# Altium PCB sensor_boom.PcbDoc
Units mil, origin at the board's own origin, x right, y up, seen from the top; angles counter-clockwise.
Board outline 2500 x 2500 mil, 2 copper layers (Top Layer, Bottom Layer); 22 components, 29 nets, 177 pads, 69 vias.
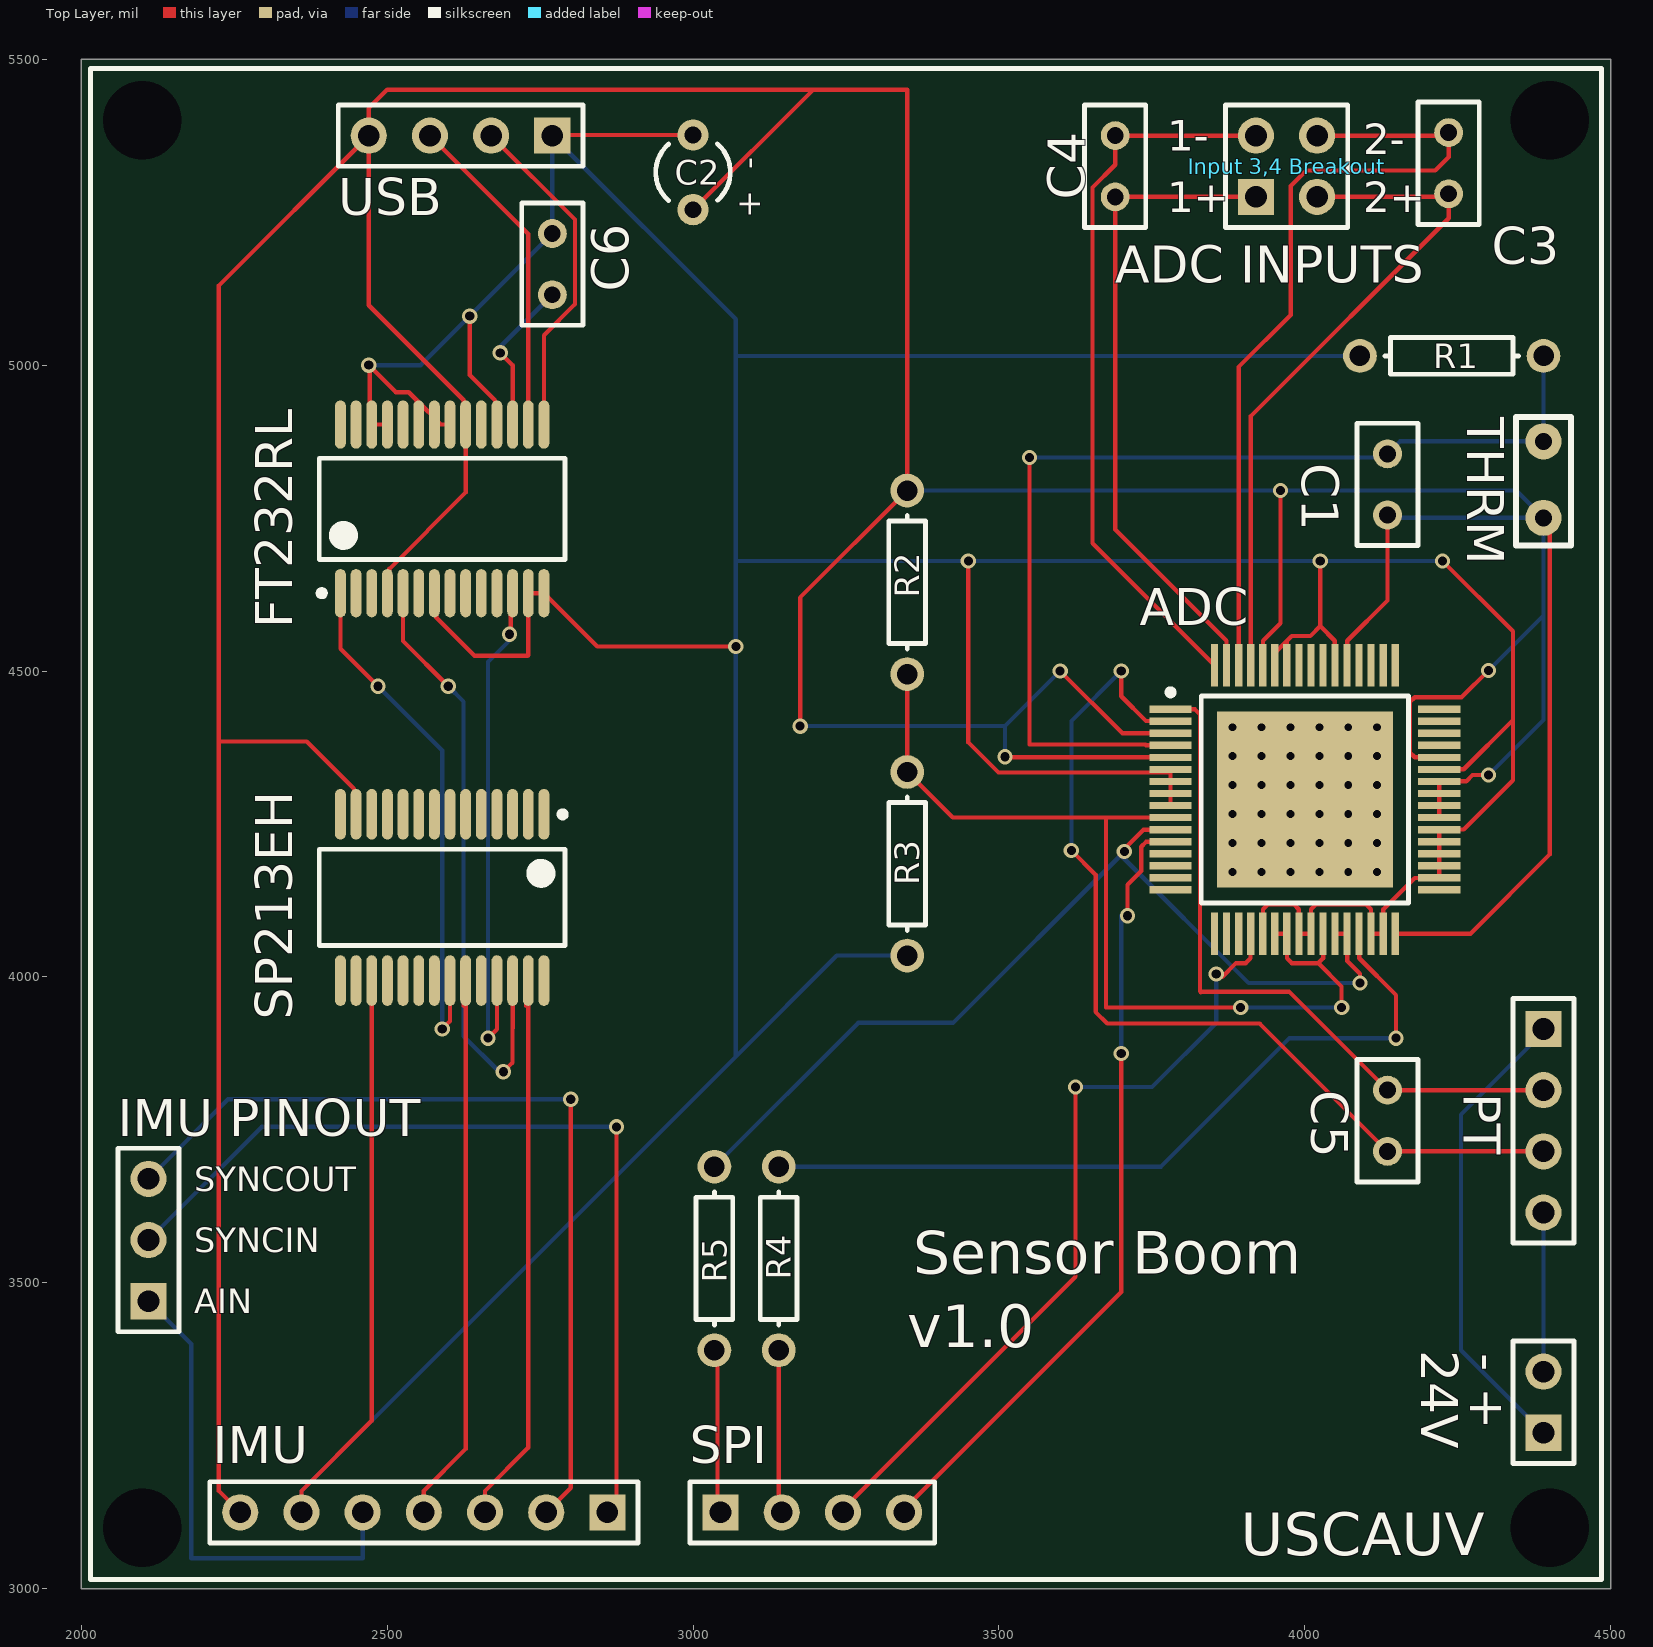
[diagram p0: Top Layer view]
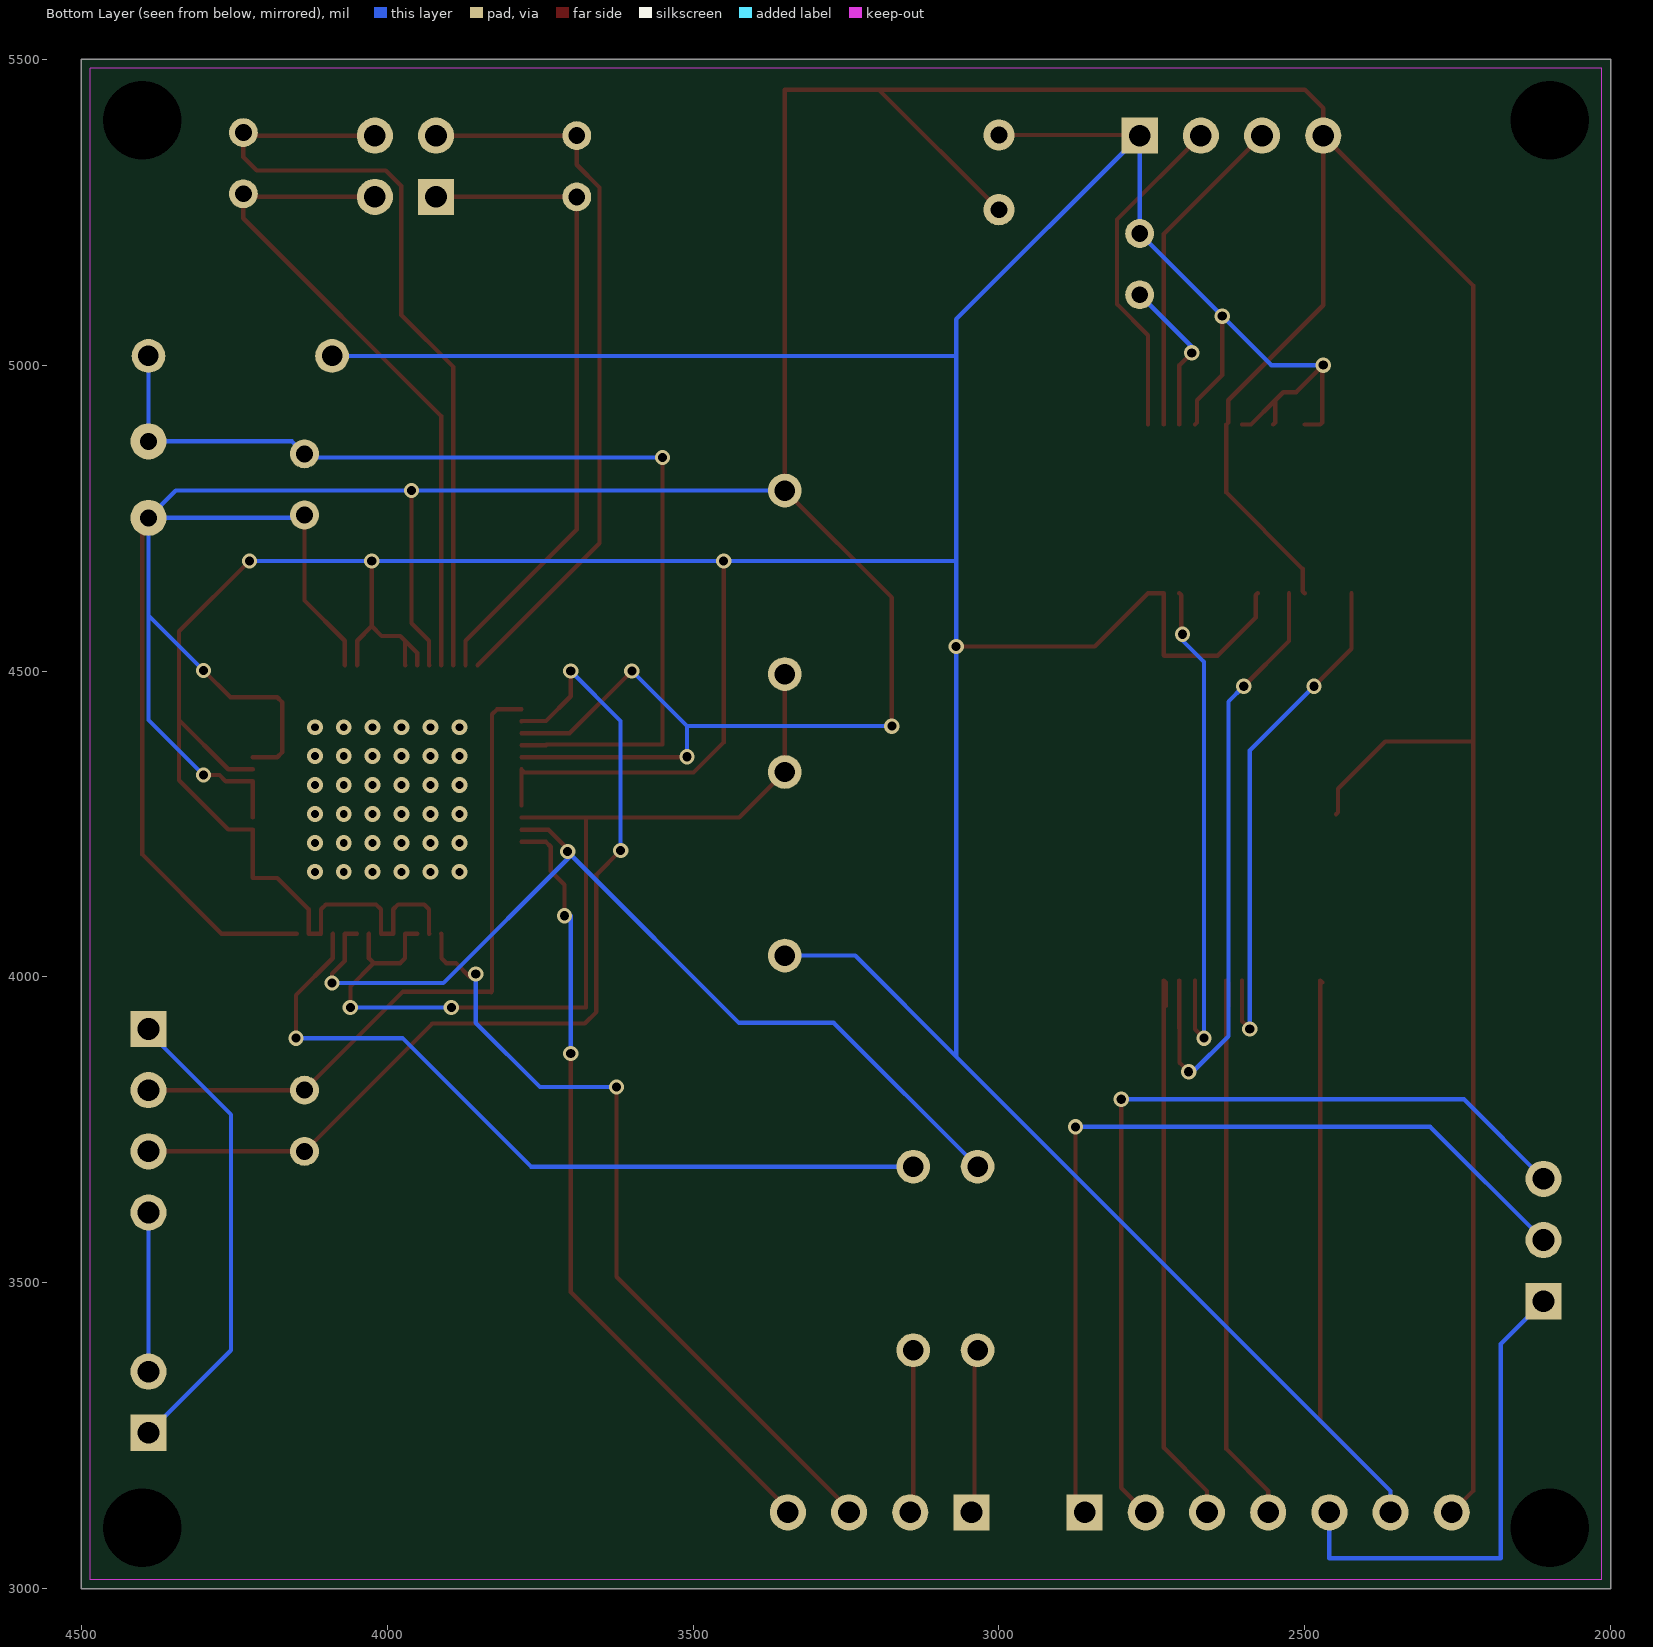
[diagram p1: Bottom Layer view, seen from below]

## Layer stack, top to bottom
Top Layer: signal copper 1.4
Dielectric: dielectric 12.6, FR-4, Dk 4.8
Bottom Layer: signal copper 1.4

## Board outline
2000,3000 4500,3000 4500,5500 2000,5500

## Design rules (kind name [scope] priority, off if disabled: settings)
Clearance [All] p1: gap=10
PolygonConnect [All] p1: connectstyle=Relief reliefconductorwidth=10 reliefentries=4 polygonreliefangle="90 Angle"
RoomDefinition sensor_boom [InComponentClass('sensor_boom')] p1: confinementstyle=ConfineIn formatcopy=TRUE lockcomponents=FALSE outline 4715,3000 13960,3000 13960,3840 4715,3840
RoutingVias [All] p1: holewidth=20 width=15 viastyle="Through Hole" minholewidth=28 minwidth=50 maxholewidth=28 maxwidth=50
SilkscreenOverComponentPads [All] p1: minsilkscreentomaskgap=10
SolderMaskExpansion [All] p1: expansion=4
Width [All] p1: maxlimit=7 minlimit=7 preferedwidth=7
27 further rules are at their usual default settings.

## Classes and differential pairs
component class sensor_boom: ADC C1 C2 C3 C4 C5 C6 IMU232Input IMU_BREAKOUT "Input 3,4 Breakout" R1 R2 R3 R4 R5 SPI_OUT

## Components (designator, comment, footprint, x,y, rotation, side; value= is the part's Value field where it differs from the comment)
"- +" "Header 2" HDR1X2 4390,3255 r90 top (schematic designator 24V)
ADC "ADC _ ADS1174" "ADC - ADS1174" 4000,4290 r0 top
C1 "Cap" RAD-0.1 4135,4805 r270 top
C2 "Cap Pol1" R38 3000,5315 r180 top
C3 "Cap" RAD-0.1 4235,5330 r90 top
C4 "Cap" RAD-0.1 3690,5325 r90 top
C5 "Cap" RAD-0.1 4135,3765 r90 top
C6 "Cap" RAD-0.1 2770,5165 r270 top
FT232RL "FT232RL" SSOP-28 2590,4765 r90 top (schematic designator RS232_to_USB)
IMU "Header 7" HDR1X7 2860,3125 r180 top (schematic designator IMU232Input)
IMU_BREAKOUT "Header 3" HDR1X3 2110,3470 r90 top
"Input 3,4 Breakout" "Header 2X2" HDR2X2 3920,5275 r0 top
PT "Header 4" HDR1X4 4390,3915 r270 top (schematic designator Pressure_Transducer)
R1 "Res1" AXIAL-0.3 4240,5015 r0 top
R2 "Res1" AXIAL-0.3 3350,4645 r270 top
R3 "Res1" AXIAL-0.3 3350,4185 r270 top
R4 "Res1" AXIAL-0.3 3140,3540 r90 top
R5 "Res1" AXIAL-0.3 3035,3540 r90 top
SP213EH "SP213EH" SSOP-28(2) 2590,4130 r270 top (schematic designator Level_Converter)
SPI "Header 4" HDR1X4 3045,3125 r0 top (schematic designator SPI_OUT)
THRM "USP10981" Thermistor 4390,4720.41 r90 top (schematic designator Thermistor)
USB "Header 4" HDR1X4 2770,5375 r180 top (schematic designator USB_OUT)

## Footprints (in the part's own frame and the unit in brackets; to place one, negate y for a bottom-side part, rotate by r counter-clockwise, add the part's x,y. Pads: shape width x height; smd on the part's side, far side on the other; paste and mask are expansions set on the pad)
"ADC - ADS1174" [mm] "TSQFP, 64-Leads, Body 12.2x12.2mm (max), Pitch 0.50mm, IPC Medium Density"
  rect 1.75x0.3 smd: 1(-5.575,3.75) 2(-5.575,3.25) 3(-5.575,2.75) 4(-5.575,2.25) 5(-5.575,1.75) 6(-5.575,1.25) 7(-5.575,0.75) 8(-5.575,0.25) 9(-5.575,-0.25) 10(-5.575,-0.75) 11(-5.575,-1.25) 12(-5.575,-1.75) 13(-5.575,-2.25) 14(-5.575,-2.75) 15(-5.575,-3.25) 16(-5.575,-3.75) 33(5.575,-3.75) 34(5.575,-3.25) 35(5.575,-2.75) 36(5.575,-2.25) 37(5.575,-1.75) 38(5.575,-1.25) 39(5.575,-0.75) 40(5.575,-0.25) 41(5.575,0.25) 42(5.575,0.75) 43(5.575,1.25) 44(5.575,1.75) 45(5.575,2.25) 46(5.575,2.75) 47(5.575,3.25) 48(5.575,3.75)
  rect 0.3x1.75 smd: 17(-3.75,-5.575) 18(-3.25,-5.575) 19(-2.75,-5.575) 20(-2.25,-5.575) 21(-1.75,-5.575) 22(-1.25,-5.575) 23(-0.75,-5.575) 24(-0.25,-5.575) 25(0.25,-5.575) 26(0.75,-5.575) 27(1.25,-5.575) 28(1.75,-5.575) 29(2.25,-5.575) 30(2.75,-5.575) 31(3.25,-5.575) 32(3.75,-5.575) 49(3.75,5.575) 50(3.25,5.575) 51(2.75,5.575) 52(2.25,5.575) 53(1.75,5.575) 54(1.25,5.575) 55(0.75,5.575) 56(0.25,5.575) 57(-0.25,5.575) 58(-0.75,5.575) 59(-1.25,5.575) 60(-1.75,5.575) 61(-2.25,5.575) 62(-2.75,5.575) 63(-3.25,5.575) 64(-3.75,5.575)
  rect 7.3x7.3 smd: 65(0,0)
  silkscreen extent -5.7,-4.3 4.3,4.57, body extent -6,-6 6,6, height 1.05
AXIAL-0.3 [mm] "Axial Device, Thru-Hole; 2 Leads; 0.3 in Pin Spacing"
  round 1.4 hole 0.85: 1(-3.81,0) 2(3.81,0)
  silkscreen extent -2.77,-0.76 2.77,0.76
HDR1X2 [mm] "Connector; Header; 2 Position"
  rect 1.5x1.5 hole 0.9: 1(0,0)
  round 1.5 hole 0.9: 2(2.54,0)
  silkscreen extent -1.27,-1.27 3.81,1.27
HDR1X3 [mm] "Connector; Header; 3 Position"
  rect 1.5x1.5 hole 0.9: 1(0,0)
  round 1.5 hole 0.9: 2(2.54,0) 3(5.08,0)
  silkscreen extent -1.27,-1.27 6.35,1.27
HDR1X4 [mm] "Connector; Header; 4 Position"
  rect 1.5x1.5 hole 0.9: 1(0,0)
  round 1.5 hole 0.9: 2(2.54,0) 3(5.08,0) 4(7.62,0)
  silkscreen extent -1.27,-1.27 8.89,1.27
HDR1X7 [mm] "Connector; Header; 7 Position"
  rect 1.5x1.5 hole 0.9: 1(0,0)
  round 1.5 hole 0.9: 2(2.54,0) 3(5.08,0) 4(7.62,0) 5(10.16,0) 6(12.7,0) 7(15.24,0)
  silkscreen extent -1.27,-1.27 16.51,1.27
HDR2X2 [mm] "Connector; Header; 2x2 Position"
  rect 1.5x1.5 hole 0.9: 1(0,0)
  round 1.5 hole 0.9: 2(0,2.54) 3(2.54,0) 4(2.54,2.54)
  silkscreen extent -1.27,-1.27 3.81,3.81
R38 [mm] "Crystal, Thru-Hole; 2 Leads; Body 3.1 x 8.2 mm (Dia.xH)"
  round 1.3 hole 0.7: 1(0,1.55) 2(0,-1.55)
  silkscreen extent -1.55,-1.19 1.55,1.17
RAD-0.1 [mm] "Radial Cap, Thru-Hole; 2 Leads; 0.1 in Pin Spacing"
  round 1.2 hole 0.7: 1(-1.27,0) 2(1.27,0)
  silkscreen extent -2.54,-1.27 2.54,1.27
SSOP-28 [mm] "SOP, 28-Leads, Body 10.2x5.3mm (max), Pitch 0.65mm, IPC Medium Density"
  oval 2x0.45 smd: 1(-3.5,4.225) 2(-3.5,3.575) 3(-3.5,2.925) 4(-3.5,2.275) 5(-3.5,1.625) 6(-3.5,0.975) 7(-3.5,0.325) 8(-3.5,-0.325) 9(-3.5,-0.975) 10(-3.5,-1.625) 11(-3.5,-2.275) 12(-3.5,-2.925) 13(-3.5,-3.575) 14(-3.5,-4.225) 15(3.5,-4.225) 16(3.5,-3.575) 17(3.5,-2.925) 18(3.5,-2.275) 19(3.5,-1.625) 20(3.5,-0.975) 21(3.5,-0.325) 22(3.5,0.325) 23(3.5,0.975) 24(3.5,1.625) 25(3.5,2.275) 26(3.5,2.925) 27(3.5,3.575) 28(3.5,4.225)
  silkscreen extent -3.62,-5.1 2.1,5.12, body extent -2.65,-5.1 2.65,5.1, height 2
SSOP-28(2) [mm] "SOP, 28-Leads, Body 10.2x5.6mm (max), Pitch 0.65mm, IPC Medium Density"
  oval 2.1x0.45 smd: 1(-3.45,4.225) 2(-3.45,3.575) 3(-3.45,2.925) 4(-3.45,2.275) 5(-3.45,1.625) 6(-3.45,0.975) 7(-3.45,0.325) 8(-3.45,-0.325) 9(-3.45,-0.975) 10(-3.45,-1.625) 11(-3.45,-2.275) 12(-3.45,-2.925) 13(-3.45,-3.575) 14(-3.45,-4.225) 15(3.45,-4.225) 16(3.45,-3.575) 17(3.45,-2.925) 18(3.45,-2.275) 19(3.45,-1.625) 20(3.45,-0.975) 21(3.45,-0.325) 22(3.45,0.325) 23(3.45,0.975) 24(3.45,1.625) 25(3.45,2.275) 26(3.45,2.925) 27(3.45,3.575) 28(3.45,4.225)
  silkscreen extent -3.57,-5.1 2,5.13, body extent -2.8,-5.1 2.8,5.1, height 2
Thermistor [mm] "USP10981"
  round 1.5 hole 0.7: 0(0.762,0) 1(3.937,0)

## Part data
"- +": "Header, 2-Pin"
C1 C3 C4 C5 C6: "Capacitor"
C2: "Polarized Capacitor (Radial)"
IMU: "Header, 7-Pin"
IMU_BREAKOUT: "Header, 3-Pin"
"Input 3,4 Breakout": "Header, 2-Pin, Dual row"
PT SPI USB: "Header, 4-Pin"
R1 R2 R3 R4 R5: "Resistor"

## Free pads (board coordinates)
  round 110 hole 128.5 mask+1: 0(4400,3100) 1(4400,5400) 2(2100,5400) 3(2100,3100)

## Via types
v1: diameter 25.98, hole 12.99, Top Layer to Bottom Layer, tented top, 36 vias
v2: diameter 25, hole 15, Top Layer to Bottom Layer, 33 vias

## Nets (pads, with @x,y where several pads share a name; then routed paths per layer and width w, separated by ;. In a path a pad name is that pad's centre, name@x,y a point inside that pad or via, vN(x,y) a via of type N, cw(c..) or ccw(c..) an arc to the next point about the centre after c; other vN are vias at no path point)
3.3V: ADC.10 ADC.22 ADC.23 ADC.26 R2.2 R3.1 | length 1577.9
  Top Layer w7: R2.2 R3.1 3424.53,4260.47 3675,4260.47 ; ADC.10 3675,4260.47 ; v2@3900,3955 v2(3895,3950) 3675,3950 3675,4260.47 ; ADC.22 ADC.23 3970.75,4070.23 3970.75,4030.47 3978.66,4022.56 4021.9,4022.56 ; ADC.26 4029.81,4070.23 4029.81,4030.47 4021.9,4022.56 ; v2(4060,3950) 4060,3984.46 4021.9,4022.56
  Bottom Layer w7: v2(3895,3950) v2(4060,3950)
5V: ADC.3 ADC.5 ADC.32 ADC.39 ADC.40 ADC.41 ADC.42 ADC.44 ADC.53 ADC.60 C1.2 C2.1 FT232RL.4 FT232RL.20 IMU.7 R2.1 SP213EH.13 THRM.0 USB.4 | length 10626.2
  Top Layer w7: IMU.7 2225,3160 2225,4385 ; SP213EH.13 2446.02,4269.06 2446.02,4307.57 2368.59,4385 2225,4385 ; FT232RL.4 2503.67,4630.44 2503.67,4666.98 2628.39,4791.7 FT232RL.20 2625.15,4906.03 2625.15,4942.57 2470,5097.72 USB.4 ; C2.1 3195,5448.98 3195,5450 ; v2(3175,4410) 3175,4620 R2.1 3350,5450 3195,5450 ; v2(3510,4360) 3511.1,4358.9 ADC.5 ; v2(3600,4500) 3701.73,4398.27 ADC.3 ; ADC.60 3931.38,4509.77 3931.38,4549.53 3960,4578.15 v2(3960,4795) ; ADC.53 4069.18,4509.77 4069.18,4549.53 4135,4615.35 C1.2 C1.2@4139.59,4750.41 ; ADC.32 4270.51,4070.51 4400,4200 4400,4740.41 THRM.0 ; ADC.39 ADC.40 ADC.41 ADC.42 4219.77,4319.81 4263.89,4319.81 4274.08,4330 v2(4300,4330) ; ADC.44 4219.21,4359.18 4179.45,4359.18 4171.54,4367.09 4171.54,4449.14 4179.45,4457.04 4256.04,4457.04 v2(4300,4501) ; 2225,4385 2225,5130 USB.4 ; USB.4 2470,5420 2500,5450 3195,5450
  Bottom Layer w7: v2(3175,4410) 3510,4410 ; R2.1 v2(3960,4795) 4345.41,4795 THRM.0 ; v2(3510,4360) 3510,4410 ; v2(3600,4500) 3510,4410 ; C1.2 4139.59,4750.41 THRM.0 ; v2(4300,4330) 4390,4420 4390,4591 ; v2(4300,4501) 4390,4591 ; 4390,4591 THRM.0
CLK: ADC.11 ADC.27 ADC.28 R5.2 | length 1563.8
  Top Layer w7: v2@3699,4199.04 3699,4203.39 3736.11,4240.51 3780.23,4240.51 ADC.11 ; ADC.27 ADC.28 4069.18,4070.23 4069.18,4026.11 4090,4005.29 v2(4090,3990)
  Bottom Layer w7: R5.2 3270,3925 3425,3925 v2@3699,4199 ; v2@3699,4199.04 v2@3699.04,4199 ; v2@3700,4199 v2@3699.04,4199 ; v2(4090,3990) 3908.04,3990 v2@3699.04,4199
  other v2: 3705,4205
DIN: ADC.12 SPI.4 | length 1297.7
  Top Layer w7: SPI.4@3340,3125 3700,3485 v2(3700,3875) ; v2(3710,4100) 3710,4150.59 3732.56,4173.15 3732.56,4212.91 3740.47,4220.82 3780.23,4220.82 ADC.12
  Bottom Layer w7: v2(3700,3875) v2@3700,4100
GND: ADC.6 ADC.7 ADC.8 ADC.9 ADC.21 ADC.24 ADC.25 ADC.30 ADC.31 ADC.34 ADC.35 ADC.36 ADC.37 ADC.38 ADC.43 ADC.54 ADC.58 ADC.59 C2.2 C6.1 FT232RL.7 FT232RL.13 FT232RL.14 FT232RL.18 FT232RL.21 FT232RL.22 FT232RL.23 FT232RL.25 FT232RL.26 IMU.6 R1.1 R3.2 SP213EH.17 USB.1 | length 10476.7
  Top Layer w7: IMU.6 2360,3160 2474.84,3274.84 SP213EH.17 SP213EH.17@2471.61,3990.94 ; v2(2470,5000) v2@2471.61,4998.39 ; FT232RL.25 FT232RL.26 2471.61,4906.03 v2@2471.61,4998.39 ; FT232RL.23 2548.38,4906.03 2548.38,4942.57 ; FT232RL.7 2580.44,4623.97 2580.44,4587.43 2642.87,4525 2730,4525 2730.75,4525.75 FT232RL.13 FT232RL.14 2843.54,4540 v2(3070,4540) ; FT232RL.21 2588.15,4902.8 2548.38,4942.57 ; v2(2635,5080) 2635,4983.9 2676.33,4942.57 2676.33,4906.03 FT232RL.18 ; USB.1 2771.02,5376.02 C2.2 ; v2(3450,4680) 3450,4383.23 3499.23,4334 3775.3,4334 ADC.6 ; ADC.6@3780.23,4339.49 ADC.6 ; ADC.9 ADC.8 ADC.7 ADC.6 ; ADC.21 3931.38,4070.79 3931.38,4110.55 3939.29,4118.46 3981.97,4118.46 3989.88,4110.55 3989.88,4070.79 ADC.24 ADC.25 4010.12,4070.79 4010.12,4110.55 4018.03,4118.46 4100.08,4118.46 4107.99,4110.55 4107.99,4070.79 ADC.30 ADC.31 4128.23,4070.79 4128.23,4110.55 4179.45,4161.77 4219.21,4161.77 ADC.34 ADC.35 ADC.36 ADC.37 ADC.38 4219.77,4241.07 4259.53,4241.07 4340,4321.54 4340,4419.96 ; ADC.59 3950.79,4529.56 3970.75,4549.53 ; ADC.58 3970.75,4509.77 3970.75,4549.53 ; v2(4025,4680) 4025,4573.46 ; ADC.54 4048.93,4509.77 4048.93,4549.53 4025,4573.46 ; ADC.43 4219.77,4339.49 4259.53,4339.49 4340,4419.96 ; v2(4225,4680) 4340,4565 4340,4419.96 ; v2@2471.61,4998.39 2514.33,4955.67 2535.28,4955.67 2548.38,4942.57 ; 3970.75,4549.53 3978.66,4557.44 4008.98,4557.44 4025,4573.46
  Bottom Layer w7: IMU.6 2360,3160 3070,3870 ; v2(2470,5000) 2555,5000 v2(2635,5080) C6.1 USB.1 3070,5075 3070,5015 ; R3.2 3235,4035 3070,3870 ; R1.1 3070,5015 ; v2(4225,4680) v2(4025,4680) v2(3450,4680) 3070,4680 ; 3070,3870 v2(3070,4540) 3070,4680 ; 3070,4680 3070,5015
Net24V_1: "- +.1" PT.1 | length 771.8
  Bottom Layer w7: 4390,3255 4255,3390 4255,3775 4390,3910 PT.1
Net24V_2: "- +.2" PT.4 | length 260
  Bottom Layer w7: 4390,3355 PT.4
NetADC_1: ADC.1 C5.2 PT.2 | length 1133.5
  Top Layer w7: ADC.1 3780.79,4437.36 3820.55,4437.36 3828.46,4429.45 3828.46,3976.54 3830,3975 3831,3976 3974,3976 C5.2 PT.2
NetADC_2: ADC.2 C5.1 PT.3 | length 1572.8
  Top Layer w7: v2(3618.38,4206.62) 3658,4167 3658,3942.96 3676.96,3924 3926,3924 C5.1 PT.3 ; v2(3700,4500) 3700,4458.7 3740.47,4418.23 3780.23,4418.23 ADC.2 ADC.2@3780.23,4417.67
  Bottom Layer w7: v2(3618.38,4206.62) 3618.38,4418.38 v2(3700,4500)
NetADC_4: ADC.4 C1.1 R1.2 THRM.1 | length 1690.6
  Top Layer w7: v2(3550,4849) 3550,4380 3739.33,4380 3740.47,4378.86 3780.23,4378.86 ADC.4
  Bottom Layer w7: v2(3550,4849) 4129,4849 C1.1 4155.41,4875.41 THRM.1 R1.2
NetADC_20: ADC.20 SPI.3 | length 1306.9
  Top Layer w7: SPI.3@3240,3125 3625,3510 v2(3625,3820) ; v2@3865,4000 3887.56,4022.56 3903.23,4022.56 3911.14,4030.47 3911.14,4070.23 ADC.20
  Bottom Layer w7: v2(3625,3820) 3750,3820 3855,3925 v2(3855,4005)
NetADC_29: ADC.29 R4.2 | length 1291.5
  Top Layer w7: ADC.29 4088.86,4070.23 4088.86,4030.47 4149,3970.33 v2(4149,3900)
  Bottom Layer w7: R4.2 3765,3690 3975,3900 v2(4149,3900)
NetADC_61: "Input 3,4 Breakout.3" ADC.61 C3.1 | length 1114.5
  Top Layer w7: ADC.61 3911.7,4509.77 3911.7,4916.7 4235,5240 4235,5275 4020,5275
NetADC_62: "Input 3,4 Breakout.4" ADC.62 C3.2 | length 1346.2
  Top Layer w7: ADC.62 3891.73,4996.73 3976.97,5081.97 3976.97,5292.82 4002.18,5318.03 4213.03,5318.03 4235,5340 4235,5375 4020,5375
NetADC_63: "Input 3,4 Breakout.1" ADC.63 C4.1 | length 1070.9
  Top Layer w7: ADC.63 3871.77,4509.77 3871.77,4549.53 3690,4731.3 C4.1 3920,5275
NetADC_64: "Input 3,4 Breakout.2" ADC.64 C4.2 | length 1193.5
  Top Layer w7: ADC.64 3652.88,4708.97 3652.88,5290.38 3690,5327.5 C4.2 3920,5375
NetC6_2: C6.2 FT232RL.17 | length 255.8
  Top Layer w7: v2(2685,5020) 2705.16,4999.84 FT232RL.17
  Bottom Layer w7: v2(2685,5020) 2685,5030 C6.2
NetIMU232Input_1: IMU.1 IMU_BREAKOUT.2 | length 1477.8
  Top Layer w7: IMU.1 2875,3140 2875,3175 v2(2875,3755)
  Bottom Layer w7: IMU_BREAKOUT.2 2295,3755 v2(2875,3755)
NetIMU232Input_2: IMU.2 IMU_BREAKOUT.3 | length 1435.4
  Top Layer w7: IMU.2 2800,3165 2800,3200 v2(2800,3800)
  Bottom Layer w7: IMU_BREAKOUT.3 2240,3800 v2(2800,3800)
NetIMU232Input_3: IMU.3 SP213EH.27 | length 941.6
  Top Layer w7: IMU.3 2660,3160 2730.75,3230.75 SP213EH.27 2727.52,3990.94 2727.52,3952.43
NetIMU232Input_4: IMU.4 SP213EH.23 | length 940.6
  Top Layer w7: IMU.4 2560,3160 2628.39,3228.39 SP213EH.23 2625.15,3990.94 2625.15,3952.43
NetIMU232Input_5: IMU.5 IMU_BREAKOUT.1 | length 804
  Bottom Layer w7: IMU_BREAKOUT.1 2180,3400 2180,3050 2460,3050 IMU.5
NetLevel_Converter_22: FT232RL.1 SP213EH.22 | length 865.6
  Top Layer w7: FT232RL.1 2423.66,4536.34 v2(2485,4475) ; v2(2590,3915) 2602.8,3927.8 SP213EH.22
  Bottom Layer w7: v2(2485,4475) 2590,4370 v2(2590,3915)
NetLevel_Converter_25: FT232RL.12 SP213EH.25 | length 822.2
  Top Layer w7: v2@2673.38,3908.38 2679.57,3914.57 SP213EH.25 ; v2(2700,4560) 2701.93,4561.93 2701.93,4623.97 FT232RL.12
  Bottom Layer w7: v2(2665,3900) 2665,4515 v2@2700,4550
NetLevel_Converter_26: FT232RL.5 SP213EH.26 | length 1009.5
  Top Layer w7: FT232RL.5 2526.02,4548.98 v2(2600,4475) ; v2(2690,3845) 2705,3860 2705,3916 2705.16,3916.16 SP213EH.26
  Bottom Layer w7: v2(2600,4475) 2625,4450 2625,3903.23 2683.23,3845 v2(2690,3845)
NetR4_1: R4.1 SPI.2 | length 265
  Top Layer w7: SPI.2@3140,3125 R4.1
NetR5_1: R5.1 SPI.1 | length 267.1
  Top Layer w7: R5.1 3040,3385 SPI.1@3040,3125
NetRS232_to_USB_15: FT232RL.15 USB.2 | length 550
  Top Layer w7: USB.2 2807.12,5237.88 2807.12,5099.62 2756.34,5048.84 FT232RL.15
NetRS232_to_USB_16: FT232RL.16 USB.3 | length 538.8
  Top Layer w7: USB.3 2730.75,5214.25 FT232RL.16
pads on no net: ADC.13 ADC.14 ADC.15 ADC.16 ADC.17 ADC.18 ADC.19 ADC.33 ADC.45 ADC.46 ADC.47 ADC.48 ADC.49 ADC.50 ADC.51 ADC.52 ADC.55 ADC.56 ADC.57 ADC.65 FT232RL.2 FT232RL.3 FT232RL.6 FT232RL.8 FT232RL.9 FT232RL.10 FT232RL.11 FT232RL.19 FT232RL.24 FT232RL.27 FT232RL.28 SP213EH.1 SP213EH.2 SP213EH.3 SP213EH.4 SP213EH.5 SP213EH.6 SP213EH.7 SP213EH.8 SP213EH.9 SP213EH.10 SP213EH.11 SP213EH.12 SP213EH.14 SP213EH.15 SP213EH.16 SP213EH.18 SP213EH.19 SP213EH.20 SP213EH.21 SP213EH.24 SP213EH.28
copper on no net:
  other v1: 3881.89,4171.89 3929.13,4171.89 3976.38,4171.89 4023.62,4171.89 4070.87,4171.89 4118.11,4171.89 3881.89,4219.13 3929.13,4219.13 3976.38,4219.13 4023.62,4219.13 4070.87,4219.13 4118.11,4219.13 3881.89,4266.38 3929.13,4266.38 3976.38,4266.38 4023.62,4266.38 4070.87,4266.38 4118.11,4266.38 3881.89,4313.62 3929.13,4313.62 3976.38,4313.62 4023.62,4313.62 4070.87,4313.62 4118.11,4313.62 3881.89,4360.87 3929.13,4360.87 3976.38,4360.87 4023.62,4360.87 4070.87,4360.87 4118.11,4360.87 3881.89,4408.11 3929.13,4408.11 3976.38,4408.11 4023.62,4408.11 4070.87,4408.11 4118.11,4408.11

## Keep-outs
Keep-Out Layer:
  lines w0: 2015,3015 4485,3015 4485,5485 2015,5485 2015,3015

## Silkscreen, mask and mechanical layers (free items; w line width, h text height)
Top Overlay:
  lines w7.87: 2015,3015 4485,3015 4485,5485 2015,5485 2015,3015
  lines w10: 4345,4705 4435,4705 4435,4915 4345,4915 4345,4705
  text "+  -" at 3110,5240 h40 r90
  text "ADC INPUTS" at 3690,5135 h60
  text "IMU PINOUT" at 2060,3740 h60
  text "SYNCOUT" at 2185,3650 h40
  text "SYNCIN" at 2185,3550 h40
  text "Sensor Boom" at 3360,3515 h70
  text "AIN" at 2185,3450 h40
  text "v1.0" at 3350,3395 h70
  text "24V" at 4190,3390 h60 r270
  text "USCAUV" at 3895,3055 h70

## Text inside footprints (layer, text, board x,y; h text height)
"Input 3,4 Breakout": Top Overlay "2+" at 4095,5250 h50; Top Overlay "2-" at 4095,5345 h50; Top Overlay "1-" at 3775,5350 h50; Top Overlay "1+" at 3775,5250 h50